# Altium PCB Flexi_encoder_BOB.pcbdoc (part 1 of 3)
Units mil, origin at the board's own origin, x right, y up, seen from the top; angles counter-clockwise.
Board outline 1230.32 x 1046.59 mil, 2 copper layers (Top Layer, Bottom Layer), stack 57.918 mil thick; 19 components, 15 nets, 2516 pads, 15 vias.
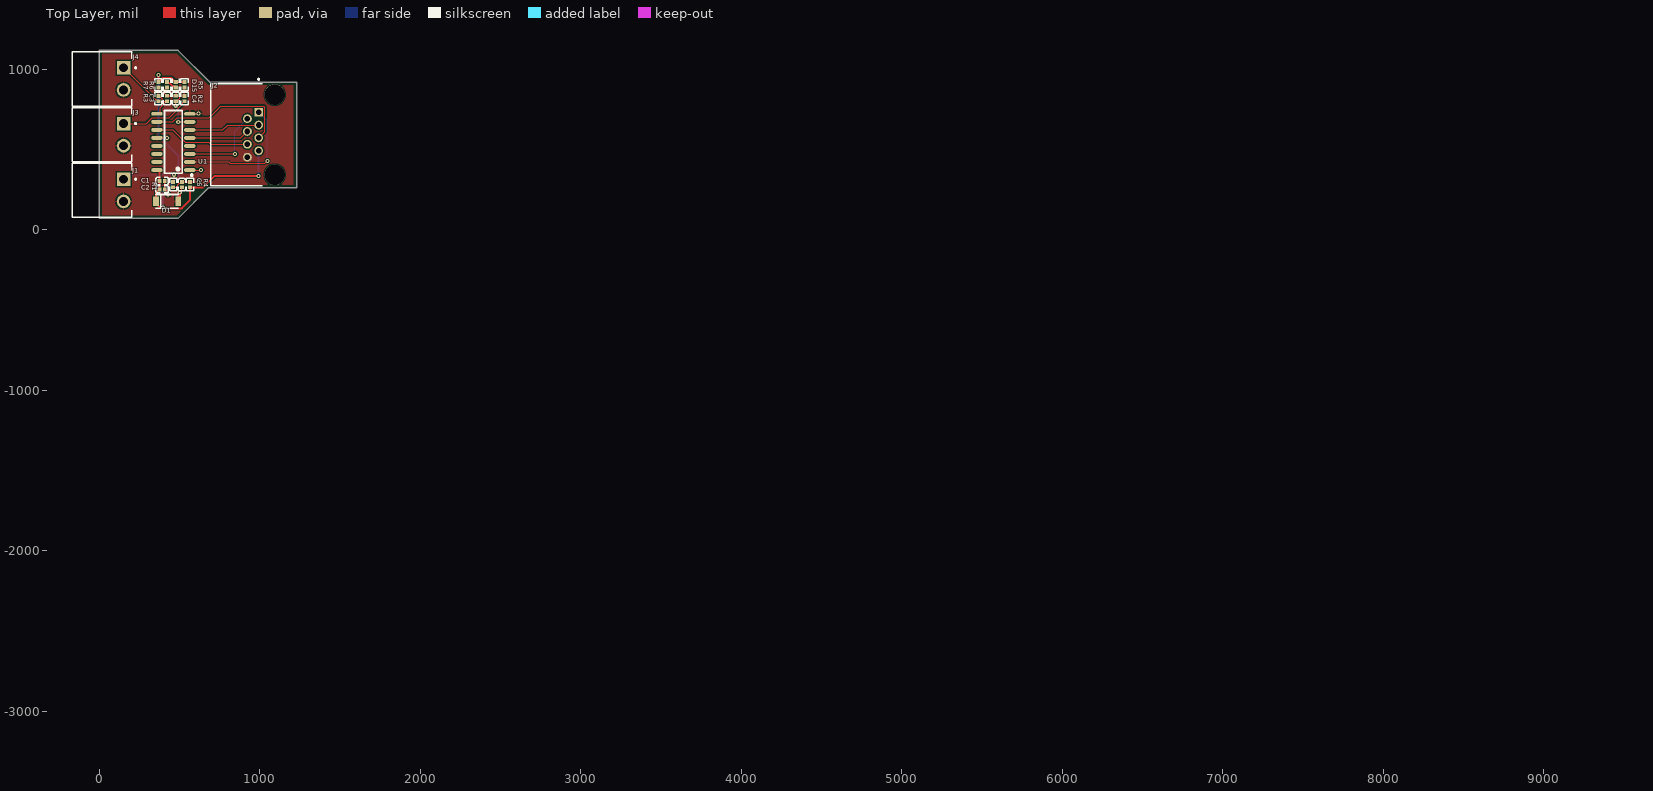
[diagram p0: Top Layer view]
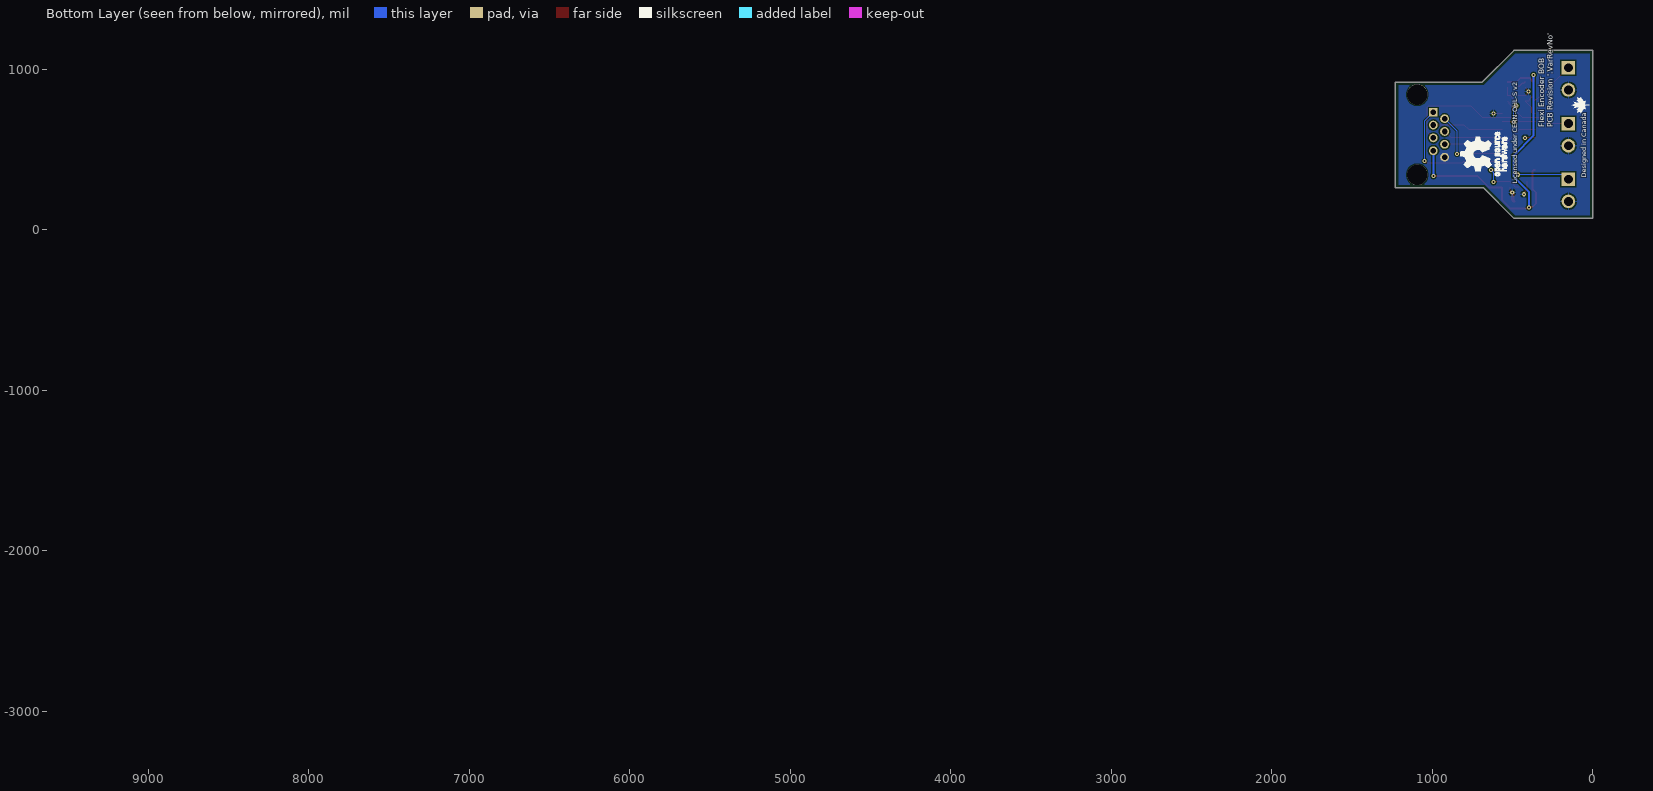
[diagram p1: Bottom Layer view, seen from below]
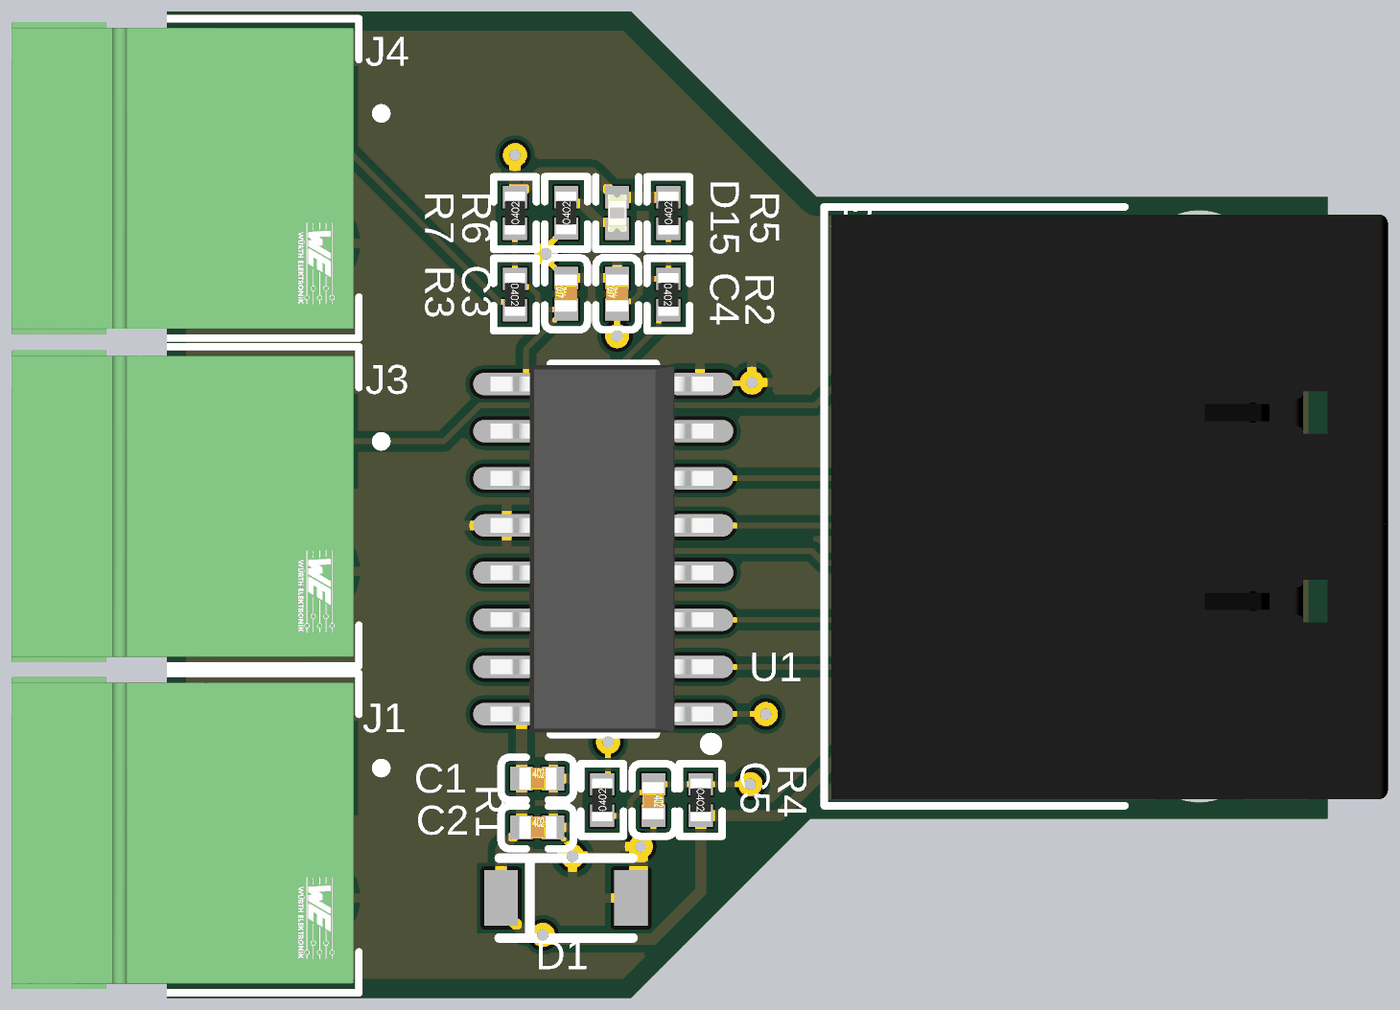
[diagram p4: 3D render of the assembled board from above, using the file's embedded part models]

## Layer stack, top to bottom
Top Solder: solder mask 0.4, Solder Resist, Dk 3.5
Top Layer: signal copper 1.4
Dielectric 3: prepreg 7.874, PP-006, Dk 4.5
Dielectric1: core 39.37, FR-4, Dk 4.8
Dielectric 4: prepreg 7.874, PP-006, Dk 4.5
Bottom Layer: signal copper 1.4
Bottom Solder: solder mask 0.4, Solder Resist, Dk 3.5

## Board outline
0,70.54 0,118.11 0,1117.13 492.13,1117.13 688.98,920.28 1230.32,920.28 1230.32,260.83 682.41,260.83 492.13,70.54

## Design rules (kind name [scope] priority, off if disabled: settings)
BoardOutlineClearance [OnLayer('Top Layer')] p1: gap=20 ignorepadtopadclearanceinfootprint=FALSE
BoardOutlineClearance BoardOutlineClearance_3 [OnLayer('GND')] p2: gap=20 ignorepadtopadclearanceinfootprint=FALSE
BoardOutlineClearance BoardOutlineClearance_2 [OnLayer('PWR')] p3: gap=20 ignorepadtopadclearanceinfootprint=FALSE
BoardOutlineClearance BoardOutlineClearance_1 [OnLayer('Bottom Layer')] p4: gap=20 ignorepadtopadclearanceinfootprint=FALSE
Clearance [All] p1: gap=8 ignorepadtopadclearanceinfootprint=TRUE except(0: SMDPad-Hole Fill-Hole Poly-Hole Region-Hole Text-Hole; 7.99: Arc-SMDPad Arc-THPad Arc-Via Track-SMDPad Track-THPad Track-Via; 10: Arc-Text Arc-Hole Track-Text Track-Hole SMDPad-Text THPad-Text Via-Via Via-Text Fill-Fill Fill-Poly Fill-Region Fill-Text Poly-Poly Poly-Region Poly-Text Region-Region Region-Text Text-Text; 12: SMDPad-Via THPad-Via; 19.68: THPad-Hole Via-Hole; 20: SMDPad-SMDPad SMDPad-THPad THPad-THPad)
Clearance "Pad Clearance" [IsPad vs IsPad] p2: gap=10 ignorepadtopadclearanceinfootprint=TRUE except(0: Arc-Hole Track-Hole SMDPad-Hole THPad-Hole Via-Hole Fill-Hole Poly-Hole Region-Hole Text-Hole; 8: Arc-Arc Arc-Track Arc-Fill Arc-Poly Arc-Region Track-Track Track-Fill Track-Poly Track-Region SMDPad-Fill SMDPad-Poly SMDPad-Region THPad-Fill THPad-Poly THPad-Region Via-Fill Via-Poly Via-Region; 12: SMDPad-Via THPad-Via; 20: SMDPad-SMDPad SMDPad-THPad THPad-THPad)
DiffPairsRouting [All] p1: maxlimit=10 minlimit=8 mostfreqgap=8 toplayer_minwidth=6 toplayer_maxwidth=15 toplayer_prefwidth=10 bottomlayer_minwidth=6 bottomlayer_maxwidth=15 bottomlayer_prefwidth=12 maxuncoupledlength=500
HoleSize [All] p1: absolutevalues=TRUE maxlimit=200 minlimit=1 maxpercent=80.000 minpercent=20.000
MinimumAnnularRing [All] p1: minimumring=5.9
MinimumSolderMaskSliver [All] p1: minsoldermaskwidth=5
PolygonConnect [All] p1: connectstyle=Relief reliefconductorwidth=10 reliefentries=4 polygonreliefangle="90 Angle" airgapwidth=10
RoutingVias [All] p1: holewidth=28 width=50 viastyle="Through Hole" minholewidth=28 minwidth=50 maxholewidth=28 maxwidth=50 useviatemplates=TRUE viatemplateguid#1={B06DB8AE-4786-4B3A-A231-31325EBD98B5} viatemplateguid#2={C817A0E2-04CB-4ECB-B084-9101D9E3CECF} viatemplateguid#3={7798B31B-59B0-45B4-AC1F-ED072D77587F} viatemplatename#1=v65h30 viatemplatename#2=v85h50 viatemplatename#3=v127h71
SilkToSolderMaskClearance SilkscreenOverComponentPads [IsPad] p1: minsilkscreentomaskgap=10 clearancetoexposedcopper=TRUE
SolderMaskExpansion [All] p1: expansion=4 istentingtop=FALSE
ViasUnderSMD [All] p1: allowed=FALSE
Width [All] p1: maxlimit=200 minlimit=6 preferedwidth=8 minimp=50.000000 maximp=50.000000 favimp=50.000000
26 further rules are at their usual default settings.

## Components (designator, comment, footprint, x,y, rotation, side; value= is the part's Value field where it differs from the comment)
C1 "100nF" 0402_C 392.72,303.39 r0 top
C2 "4.7uF" 0402_C 392.72,251.61 r0 top
C3 "100nF" 0402_C 423.23,817.56 r90 top
C4 "100nF" 0402_C 477.36,817.56 r90 top
C5 "100nF" 0402_C 515.75,280.75 r270 top
D1 "ZMM5V6" LL-34 423.23,176.77 r0 top
D15 "0402 Green" "LED 0402_1005 RED" 477.36,903.19 r270 top
J1 "691322110002" FP-691322110002-MFG 18.7,245.67 r270 top
J2 "RJHSE-5080" FP-RJHSE-5080-MFG 999.09,592.13 r90 top
J3 "691322110002" FP-691322110002-MFG 18.7,592.13 r270 top
J4 "691322110002" FP-691322110002-MFG 18.7,939.96 r270 top
R1 "200Ω ±1%" 0402_R 461.42,280.75 r90 top
R2 "200Ω ±1%" 0402_R 531.5,816.77 r270 top
R3 "200Ω ±1%" 0402_R 369.09,816.77 r270 top
R4 "4.7KΩ ±1%" 0402_R 565.94,280.75 r270 top
R5 "4.7KΩ ±1%" 0402_R 531.5,903.19 r90 top
R6 "4.7KΩ ±1%" 0402_R 423.23,903.37 r90 top
R7 "4.7KΩ ±1%" 0402_R 369.09,903.19 r90 top
U1 "AM26LS31CDRG4" SOIC-16_150mil 462.6,546.89 r90 top

## Footprints (in the part's own frame and the unit in brackets; to place one, negate y for a bottom-side part, rotate by r counter-clockwise, add the part's x,y. Pads: shape width x height; smd on the part's side, far side on the other; paste and mask are expansions set on the pad)
0402_C [mm]
  rect 0.6x0.65 smd mask+0.051: 1(-0.425,0) 2(0.425,0)
  silkscreen extent -0.97,-0.58 0.97,0.58, body extent -0.48,-0.3 0.52,0.3, height 0.2
0402_R [mm]
  rect 0.6x0.65 smd mask+0.051: 1(-0.425,0) 2(0.425,0)
  silkscreen extent -0.97,-0.58 0.97,0.58, body extent -0.57,-0.27 0.58,0.28, height 0.41
FP-691322110002-MFG [mm]
  rect 2.15x2.15 hole 1.4 paste-1000 mask+0: 1(-1.75,3.4)
  round 2.15 hole 1.4 paste-1000 mask+0: 2(1.75,3.4)
  silkscreen extent -4.3,-4.7 4.3,5.43, body extent -4.4,-4.8 4.4,4.8, height 0.25
FP-RJHSE-5080-MFG [mm]
  rect 1.39x1.39 hole 0.89 paste-1000 mask+0: 1(3.556,0.127)
  round 1.39 hole 0.89 paste-1000 mask+0: 2(2.54,1.905) 3(1.524,0.127) 4(0.508,1.905) 5(-0.508,0.127) 6(-1.524,1.905) 7(-2.54,0.127) 8(-3.556,1.905)
  round 3.25 hole 3.25 unplated paste-1000 mask+0: ""(-6.35,-2.413) ""(6.35,-2.413)
  silkscreen extent -8.06,-0.41 8.89,7.68, body extent -7.89,-7.49 7.86,7.49, height 13.21
"LED 0402_1005 RED" [mm] "Chip Diode, 2-Leads, Body 1.00x0.50mm, IPC Medium Density"
  rect 0.6x0.65 smd mask+0.051: A(-0.425,0) K(0.425,0)
  silkscreen extent -0.97,-0.58 0.97,0.58, body extent -0.5,-0.25 0.5,0.25, height 0.21
LL-34 [mm]
  rect 0.9x1.5 smd: 1(1.75,0) 2(-1.75,0)
  silkscreen extent -1.8,-1.08 1.8,1.08
SOIC-16_150mil [mm]
  oval 0.6x1.8 smd: 1(-4.445,-2.6) 2(-3.175,-2.6) 3(-1.905,-2.6) 4(-0.635,-2.6) 5(0.635,-2.6) 6(1.905,-2.6) 7(3.175,-2.6) 8(4.445,-2.6) 9(4.445,2.6) 10(3.175,2.6) 11(1.905,2.6) 12(0.635,2.6) 13(-0.635,2.6) 14(-1.905,2.6) 15(-3.175,2.6) 16(-4.445,2.6)
  silkscreen extent -5.4,-3.05 4.97,1.4, body extent -4.95,-2.97 4.95,3.03, height 1.75

## Part data
C1 C3 C4 C5: library part "0402 100nF (104) 10% 16V", "Chip capacitors", Manufacturer="Samsung Electro-Mechanics", Package=0402, PartNumber=CL05B104KO5NNNC, SuppliersPartNumber=C1525, Tolerance=10%, VOLTAGE=16V, Capacitance=100nF, ComponentLink1Description="Supplier link", ComponentLink1URL=http://www.szlcsc.com/product/details_1877.html, Supplier=LC
C2: library part "0402 4.7uF (475) 20% 10V", "Chip capacitor", Manufacturer="Samsung Electro-Mechanics", Package=0402, PartNumber=CL05A475MP5NRNC, SuppliersPartNumber=C23733, Tolerance=20%, VOLTAGE=10V, Capacitance=4.7uF, ComponentLink1Description="Supplier link", ComponentLink1URL=http://www.szlcsc.com/product/details_24469.html, Supplier=LC
D1: library part "LL-34 ZMM5V6", "500mW - 0.1uA @ 1V 5.6V LL-34 Zener Diodes ROHS", Package=LL-34, SuppliersPartNumber=C8062, ComponentLink1Description=供应商链接, ComponentLink1URL=http://www.szlcsc.com/product/details_8541.html, Supplier=LC
D15: library part "0402 LED Green", "LED", Color=Green, Package=0402, SuppliersPartNumber=C130723, Supplier=LC
J1 J3 J4: library part CMP-1502-01791-2, "TERM BLOCK HDR 2POS 90DEG 3.5MM", Color=Green, Current=10A, Flammability Rating="UL94 V-0", Package Quantity=1000, VOLTAGE=300V, Contact Material=Brass, HEIGHT=9.2mm, Housing Material=Nylon, Lead Free="Lead Free", Length=10.5mm, Mount="Through Hole", Number of Contacts=2, Number of Levels=1, Number of Positions=2, Number of Positions Per Level=2, Number of Rows=1, Packaging=Bulk, Pitch=3.5mm, RoHS Compliant=Yes, Series="WR-TBL Series 3221", Termination=Solder, Width=8.1mm
J2: library part CMP-02366-000003-1, "CONN MOD JACK 8P8C R/A UNSHLD", Manufacturer="Pulse Electronics Network", Manufacturer Part Number=E5J88-00LJG2-L, Package=CONN_MOD_JACK, SuppliersPartNumber=C385834, ComponentLink2Description=Datasheet, ComponentLink2URL=https://cdn.amphenol-icc.com/media/wysiwyg/files/documentation/datasheet/inputoutput/io-modjack-rjhse.pdf, Device Class L1=Connectors, Digikey Description="CONN MOD JACK 8P8C R/A UNSHLD", Pitch=1.02mm
R1 R2 R3: library part "0402 200R (2000) 1%", "Chip resistor", Manufacturer="Uniroyal Elec", Package=0402, PartNumber=0402WGF2000TCE, Power=1/16W, Resistance=200Ω, SuppliersPartNumber=C25087, Tolerance=1%, ComponentLink1Description="Supplier link", ComponentLink1URL=http://www.szlcsc.com/product/details_25830.html, Supplier=LC
R4 R5 R6 R7: library part "0402 4.7K (4701) 1%", "Chip resistor", Manufacturer="Uniroyal Elec", Package=0402, PartNumber=0402WGF4701TCE, Power=1/16W, Resistance=4.7KΩ, SuppliersPartNumber=C25900, Tolerance=1%, ComponentLink1Description="Supplier link", ComponentLink1URL=http://www.szlcsc.com/product/details_26643.html, Supplier=LC
U1: library part AM26LS31CDRG4_[C6179], "4/0 Driver - RS422, RS485 16-SOIC", Manufacturer 1="Texas Instruments", Manufacturer Part Number 1=AM26LS31CDR, Package=SOIC-16_150mil, SuppliersPartNumber=C6179, ComponentLink1Description=供应商链接, ComponentLink1URL=http://www.szlcsc.com/product/details_6645.html, Supplier=LC